# Allegro board 36i0_ctrl.brd
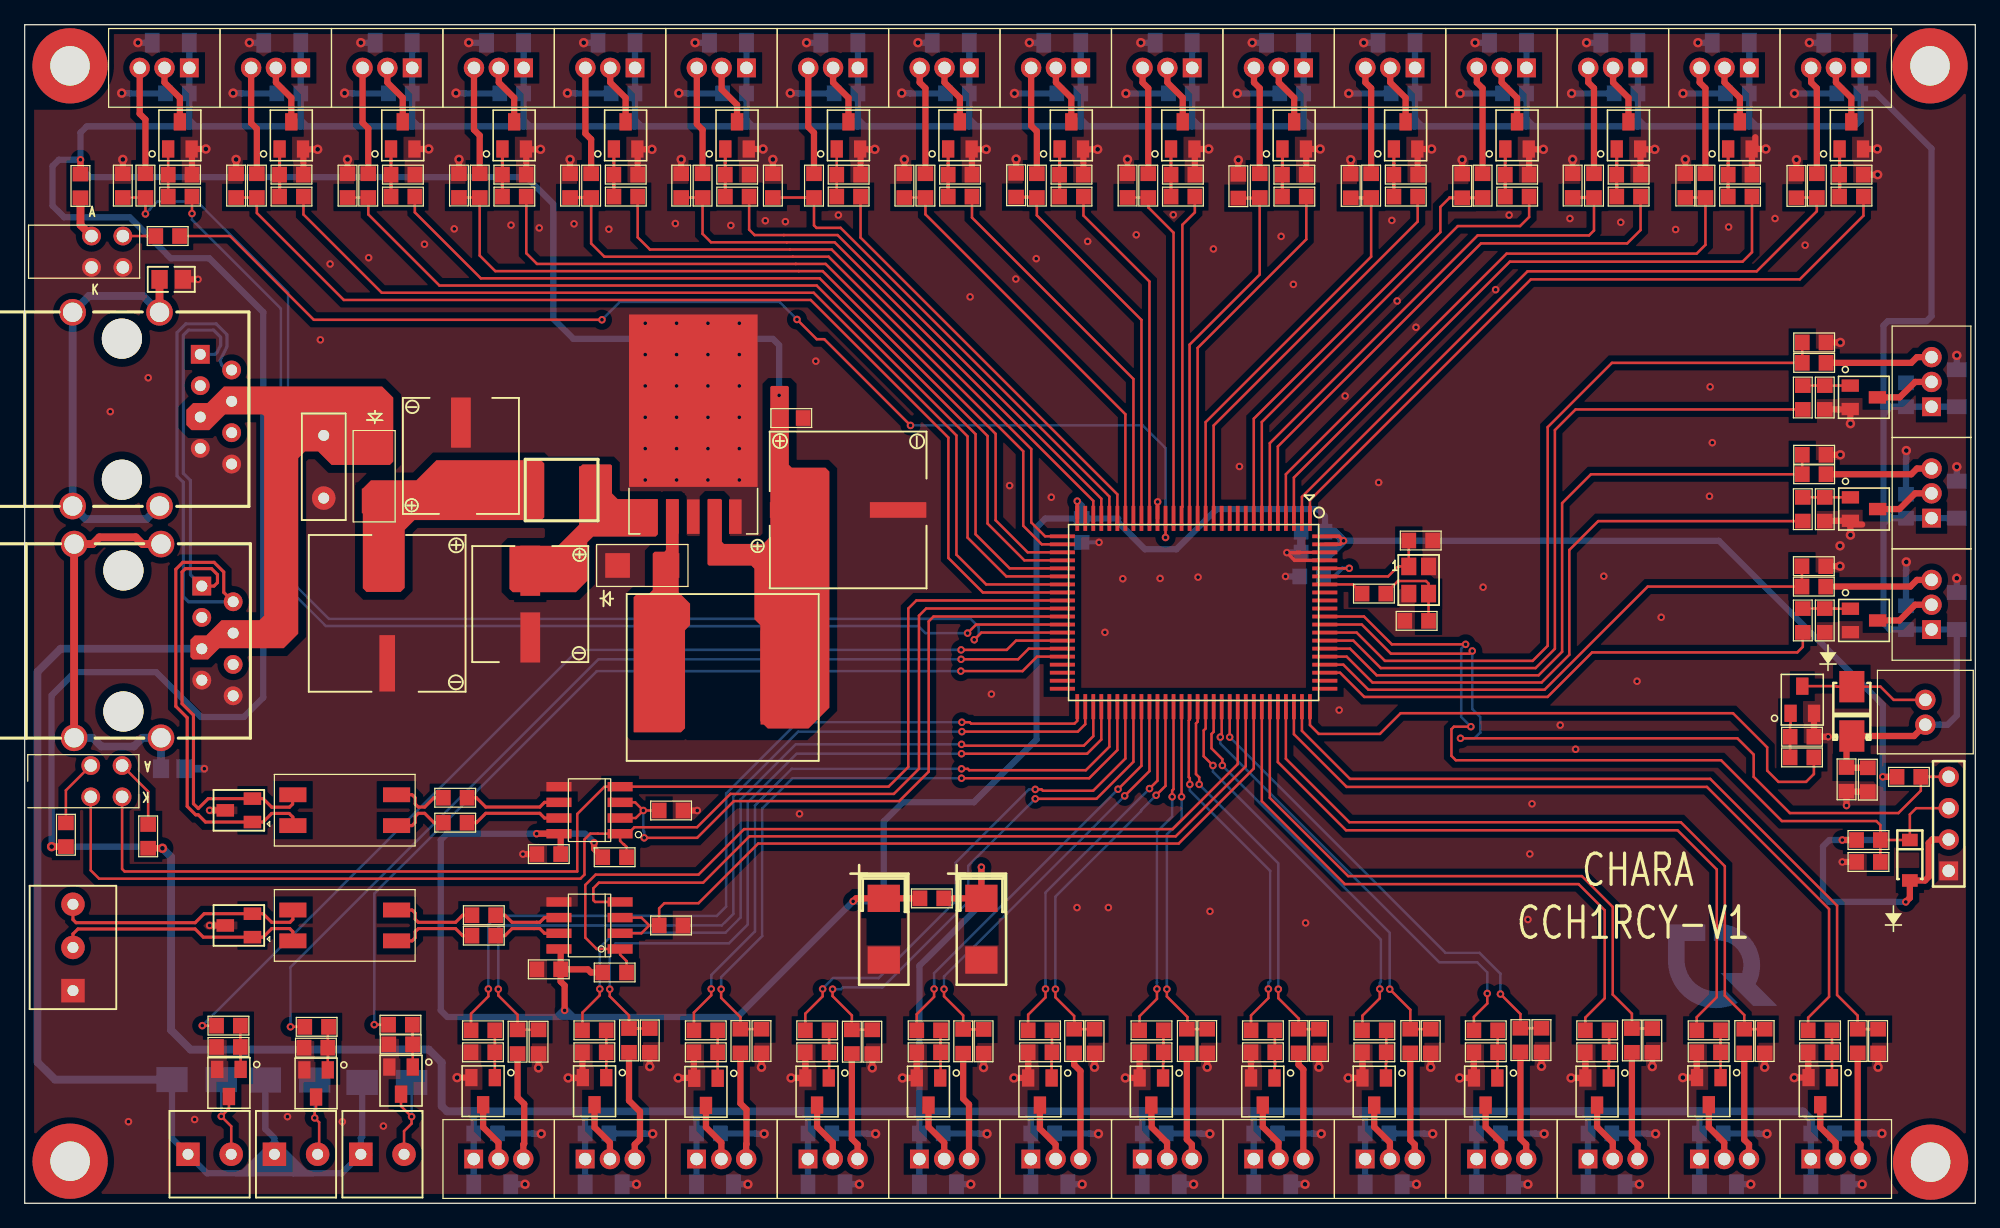
[diagram p0: board, top side]
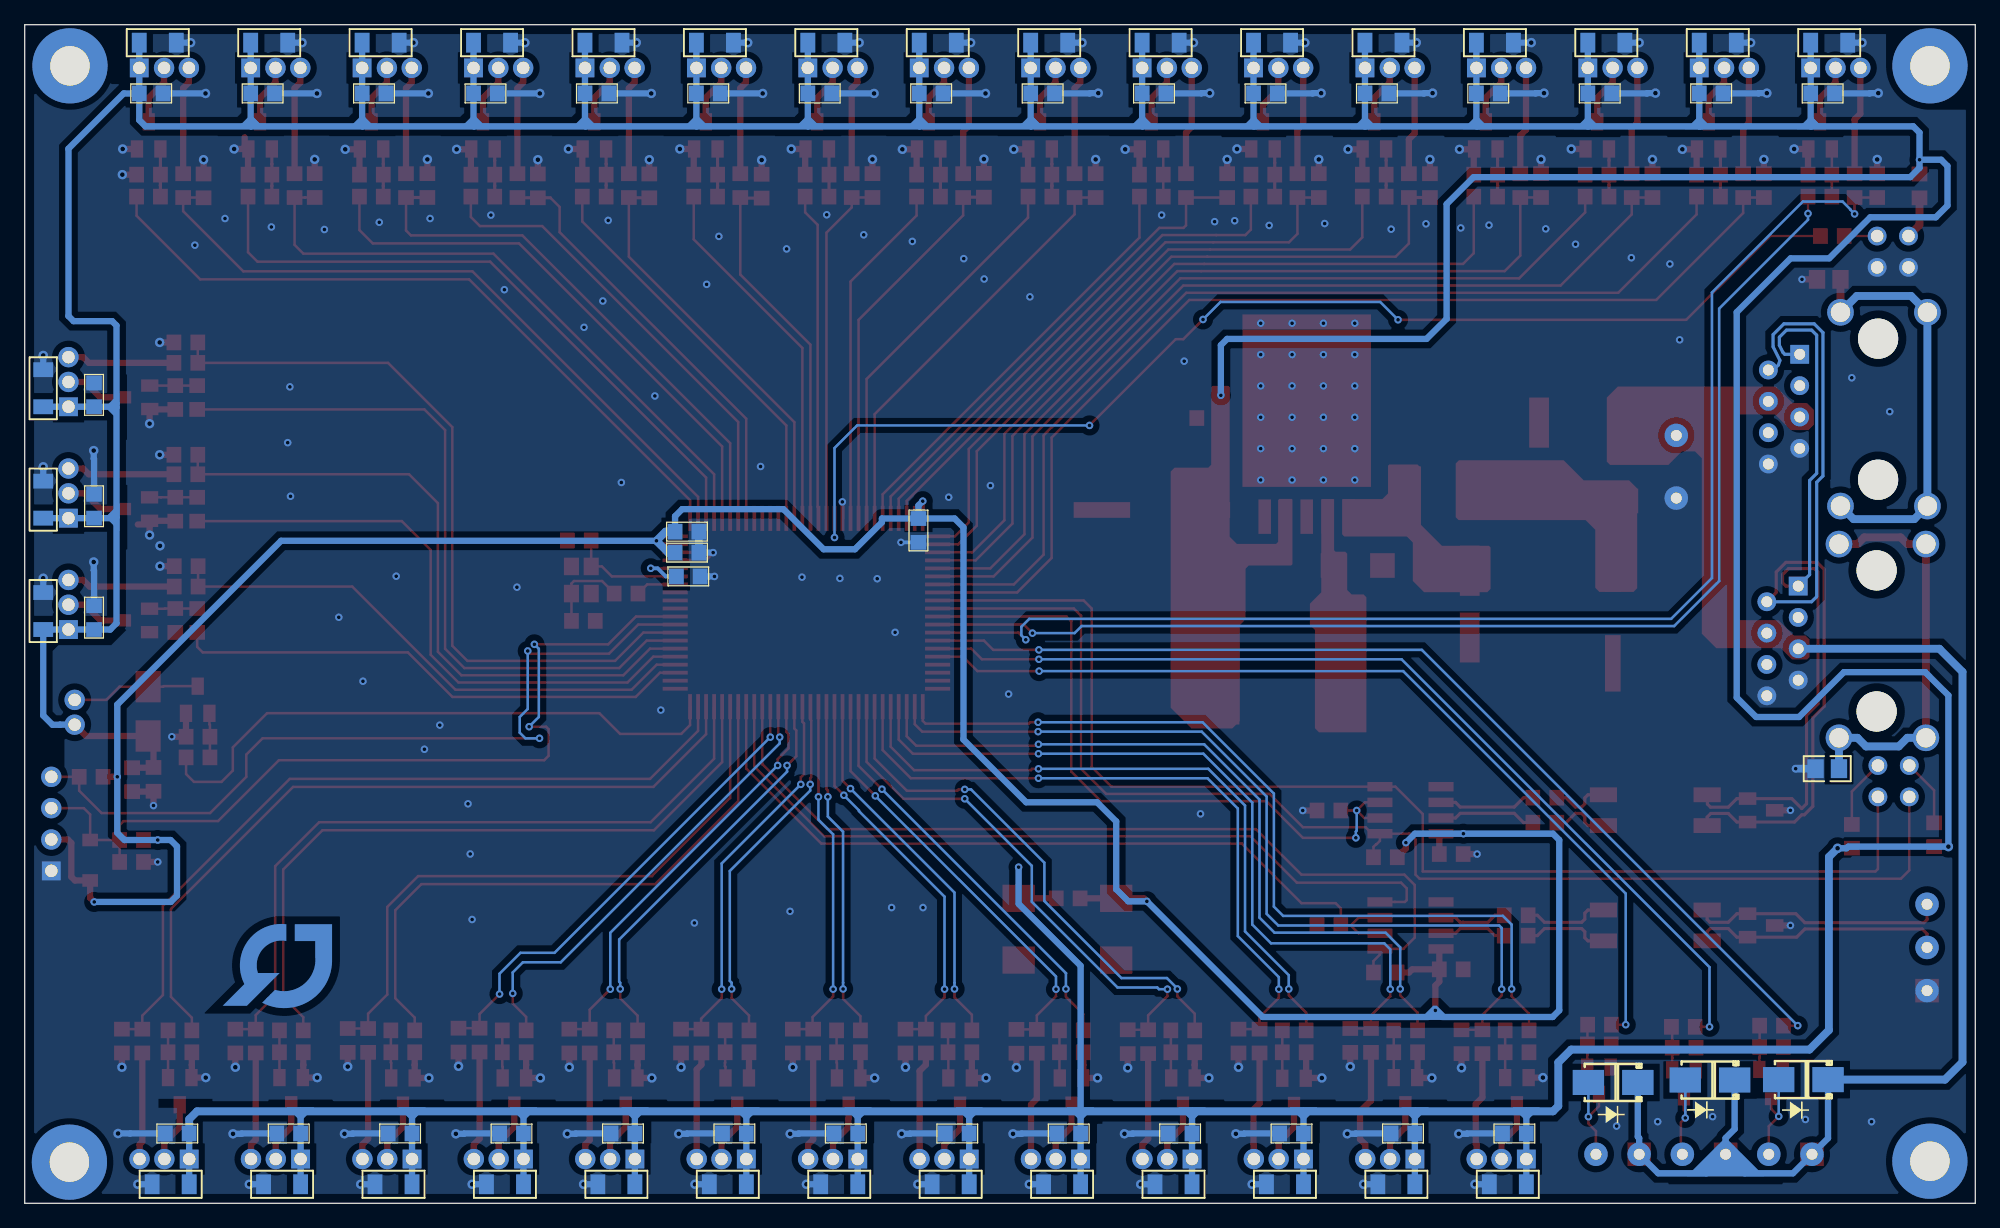
[diagram p1: board, bottom side, seen from below]

Outline 158 x 95.5 mm; copper layers: TOP, BOTTOM. Coordinates in mm from the lower left corner of the outline.
Outline path: 0,95.5 158,95.5 158,0 0,0 0,95.5

## Design rules (mm)
net group DIFFPAIR0: nets RS485_A RS485_B
net group DIFFPAIR1: nets N1101555 N1101559
net group DIFFPAIR2: nets N1101325 N1101379
net group DIFFPAIR3: nets RS485_A2 RS485_B2
net group DIFFPAIR4: nets N2237727 N2237775
net group DIFFPAIR5: nets N2237937 N2237941
net group PWR: nets 5V +24V VDD

## Placement (name value [footprint] x y rotation side)
C17  10uF/50V  [10UF_50V]  35.33 57.86 0 top
C18  100nF  [0805]  62.1 63.62 180 top
C20  470uF/25V  [220UF_50V]  66.7 56.18 270 top
C24  4.7uF/50V  [10UF_50V]  40.95 51.25 180 top
C42  20pF  [0805]  113.08 53.7 180 top
C43  20pF  [0805]  112.75 47.19 0 top
C51  100nF  [0805]  149.35 27.66 0 top
C92  100nF  [0805]  147.57 34.35 90 top
C93  100nF  [0805]  42.45 28.3 180 top
C94  1uF  [0805]  149.3 34.33 90 top
C107  10uF/16V  [1206]  65.99 94.04 180 bottom
C108  100nF  [0805]  66.53 89.93 0 bottom
C109  10uF/50V  [CASE_C_6032]  77.49 22.21 270 top
C111  10uF/16V  [1206]  64.95 1.54 0 bottom
C112  100nF  [0805]  64.41 5.66 180 bottom
C113  10uF/16V  [1206]  137.16 1.54 0 bottom
C114  100nF  [0805]  136.62 5.66 180 bottom
C115  10uF/16V  [1206]  138.2 94.04 180 bottom
C116  100nF  [0805]  138.73 89.93 0 bottom
C117  10uF/16V  [1206]  56.97 94.04 180 bottom
C118  100nF  [0805]  57.5 89.93 0 bottom
C121  100nF  [0805]  60.6 82.46 90 top
C123  100nF  [0805]  68.66 13.1 270 top
C124  100nF  [0805]  140.94 13.15 270 top
C125  100nF  [0805]  134.51 82.46 90 top
C126  100nF  [0805]  53.18 82.46 90 top
C128  100nF  [0805]  77.67 13.13 270 top
C129  100nF  [0805]  150.13 13.15 270 top
C130  100nF  [0805]  125.39 82.46 90 top
C131  100nF  [0805]  44.18 82.46 90 top
C132  100nF  [0805]  144.92 51.62 0 top
C133  100nF  [0805]  86.66 13.15 270 top
C135  100nF  [0805]  116.44 82.44 90 top
C136  100nF  [0805]  35.18 82.46 90 top
C137  100nF  [0805]  144.95 60.65 0 top
C138  100nF  [0805]  95.79 13.15 270 top
C140  100nF  [0805]  107.41 82.44 90 top
C141  100nF  [0805]  26.15 82.46 90 top
C142  100nF  [0805]  144.95 69.75 0 top
C143  100nF  [0805]  104.84 13.15 270 top
C145  100nF  [0805]  98.31 82.41 90 top
C146  100nF  [0805]  17.13 82.46 90 top
C147  100nF  [0805]  41.62 13.1 270 top
C148  100nF  [0805]  113.89 13.15 270 top
C150  100nF  [0805]  89.33 82.46 90 top
C151  100nF  [0805]  7.95 82.46 90 top
C152  100nF  [0805]  50.63 13.2 270 top
C153  100nF  [0805]  122.86 13.22 270 top
C155  100nF  [0805]  80.31 82.49 90 top
C157  100nF  [0805]  59.68 13.15 270 top
C158  100nF  [0805]  131.84 13.2 270 top
C159  100nF  [0805]  143.52 82.44 90 top
C160  100nF  [0805]  71.26 82.46 90 top
C161  10uF/16V  [1206]  73.97 1.54 0 bottom
C162  100nF  [0805]  73.44 5.66 180 bottom
C163  10uF/16V  [1206]  146.18 1.54 0 bottom
C164  100nF  [0805]  145.65 5.66 180 bottom
C165  10uF/16V  [1206]  129.17 94.04 180 bottom
C166  100nF  [0805]  129.71 89.93 0 bottom
C167  10uF/16V  [1206]  47.94 94.04 180 bottom
C168  100nF  [0805]  48.47 89.93 0 bottom
C169  10uF/16V  [1206]  156.5 47.99 90 bottom
C170  100nF  [0805]  152.39 47.45 270 bottom
C171  10uF/16V  [1206]  83 1.54 0 bottom
C172  100nF  [0805]  82.46 5.66 180 bottom
C175  10uF/16V  [1206]  120.15 94.04 180 bottom
C176  100nF  [0805]  120.68 89.93 0 bottom
C177  10uF/16V  [1206]  38.91 94.04 180 bottom
C178  100nF  [0805]  39.45 89.93 0 bottom
C179  10uF/16V  [1206]  156.5 57.01 90 bottom
C180  100nF  [0805]  152.39 56.48 270 bottom
C181  10uF/16V  [1206]  92.03 1.54 0 bottom
C182  100nF  [0805]  91.49 5.66 180 bottom
C183  10uF/16V  [1206]  111.12 94.04 180 bottom
C184  100nF  [0805]  111.66 89.93 0 bottom
C187  10uF/16V  [1206]  29.89 94.04 180 bottom
C188  100nF  [0805]  30.42 89.93 0 bottom
C189  10uF/16V  [1206]  156.5 66.04 90 bottom
C190  100nF  [0805]  152.39 65.51 270 bottom
C191  10uF/16V  [1206]  101.05 1.54 0 bottom
C192  100nF  [0805]  100.52 5.66 180 bottom
C195  10uF/16V  [1206]  102.1 94.04 180 bottom
C196  100nF  [0805]  102.63 89.93 0 bottom
C197  10uF/16V  [1206]  20.86 94.04 180 bottom
C198  100nF  [0805]  21.4 89.93 0 bottom
C199  10uF/16V  [1206]  37.87 1.54 0 bottom
C200  100nF  [0805]  37.33 5.66 180 bottom
C201  10uF/16V  [1206]  110.08 1.54 0 bottom
C202  100nF  [0805]  109.54 5.66 180 bottom
C205  10uF/16V  [1206]  93.07 94.04 180 bottom
C206  100nF  [0805]  93.6 89.93 0 bottom
C207  10uF/16V  [1206]  84.04 94.04 180 bottom
C208  100nF  [0805]  84.58 89.93 0 bottom
C211  10uF/16V  [1206]  46.9 1.54 0 bottom
C212  100nF  [0805]  46.36 5.66 180 bottom
C213  10uF/16V  [1206]  119.1 1.54 0 bottom
C214  100nF  [0805]  118.57 5.66 180 bottom
C215  10uF/16V  [1206]  11.84 94.04 180 bottom
C216  100nF  [0805]  12.37 89.93 0 bottom
C219  10uF/16V  [1206]  55.92 1.54 0 bottom
C220  100nF  [0805]  55.39 5.66 180 bottom
C221  10uF/16V  [1206]  128.13 1.54 0 bottom
C222  100nF  [0805]  127.59 5.66 180 bottom
C223  10uF/16V  [1206]  147.23 94.04 180 bottom
C224  100nF  [0805]  147.76 89.93 0 bottom
C225  10uF/16V  [1206]  75.02 94.04 180 bottom
C226  100nF  [0805]  75.55 89.93 0 bottom
C227  1uF  [0805]  104.25 50.79 180 bottom
C230  100nF  [0805]  85.61 54.52 90 bottom
C231  100nF  [0805]  104.36 54.42 180 bottom
C232  100nF  [0805]  104.36 52.72 180 bottom
C233  100nF  [0805]  42.45 18.96 180 top
C234  4,7uF/50V  [CASE_C_6032]  69.59 22.21 270 top
C235  220uF/50V  [220UF_50V]  29.36 47.8 180 top
D1  LED BI-COLOUR  [LED_DOUBLE_1]  5.35 35.47 0 top
D3  MRA4007  [CASE403D_SMA]  148 39.86 270 top
D5  SM712  [SOT23]  17.35 31.84 90 top
D7  SM712  [SOT23]  17.35 22.51 90 top
D14  SS34  [POWERDIODE]  28.31 60.91 270 top
D15  SS14  [POWERDIODE]  48.02 51.68 0 top
D48  LED BI-COLOUR  [LED_DOUBLE_1]  5.41 78.37 0 top
D49  1N4148  [SOD123]  152.7 27.8 90 top
D102  MRA4007  [CASE403D_SMA]  29.34 9.79 180 bottom
D104  MRA4007  [CASE403D_SMA]  21.49 9.99 180 bottom
D106  MRA4007  [CASE403D_SMA]  13.93 10.02 180 bottom
J1  CONN RECT 3  [CONN_RMC_1X3_80P]  67.49 92 180 top
J2  CONN_DEBUGGER  [BERG_1X4_2P54]  155.85 26.94 90 top
J3  CONN RECT 3  [CONN_RMC_1X3_80P]  63.45 3.59 0 top
J4  CONN RECT 3  [CONN_RMC_1X3_80P]  135.66 3.59 0 top
J5  CONN RECT 3  [CONN_RMC_1X3_80P]  139.7 92 180 top
J6  CONN RECT 3  [CONN_RMC_1X3_80P]  58.47 92 180 top
J8  CONN RECT 3  [CONN_RMC_1X3_80P]  72.47 3.59 0 top
J9  CONN RECT 3  [CONN_RMC_1X3_80P]  144.68 3.59 0 top
J10  CONN RECT 3  [CONN_RMC_1X3_80P]  130.67 92 180 top
J11  CONN RECT 3  [CONN_RMC_1X3_80P]  49.44 92 180 top
J12  CONN RECT 3  [CONN_RMC_1X3_80P]  154.46 46.49 90 top
J13  CONN RECT 3  [CONN_RMC_1X3_80P]  81.5 3.59 0 top
J15  CONN RECT 3  [CONN_RMC_1X3_80P]  121.65 92 180 top
J17  CONN RECT 3  [CONN_RMC_1X3_80P]  40.41 92 180 top
J18  CONN RECT 3  [CONN_RMC_1X3_80P]  154.46 55.51 90 top
J19  CONN RECT 3  [CONN_RMC_1X3_80P]  90.53 3.59 0 top
J21  CONN RECT 3  [CONN_RMC_1X3_80P]  112.62 92 180 top
J22  CONN RECT 3  [CONN_RMC_1X3_80P]  31.39 92 180 top
J23  CONN RECT 3  [CONN_RMC_1X3_80P]  154.46 64.54 90 top
J24  CONN RECT 3  [CONN_RMC_1X3_80P]  99.55 3.59 0 top
J25  RJ45-8Z4  [RJ45-J00-0014NL_2]  14.35 50.01 270 top
J26  CONN RECT 3  [CONN_RMC_1X3_80P]  103.6 92 180 top
J27  CONN RECT 3  [CONN_RMC_1X3_80P]  22.36 92 180 top
J28  CONN RECT 3  [CONN_RMC_1X3_80P]  36.37 3.59 0 top
J29  CONN RECT 3  [CONN_RMC_1X3_80P]  108.58 3.59 0 top
J31  CONN RECT 3  [CONN_RMC_1X3_80P]  94.57 92 180 top
J32  CONN RECT 3  [CONN_RMC_1X3_80P]  13.34 92 180 top
J33  CONN RECT 3  [CONN_RMC_1X3_80P]  45.4 3.59 0 top
J34  CONN RECT 3  [CONN_RMC_1X3_80P]  117.6 3.59 0 top
J36  CONN RECT 3  [CONN_RMC_1X3_80P]  85.54 92 180 top
J38  CONN RECT 3  [CONN_RMC_1X3_80P]  54.42 3.59 0 top
J39  CONN RECT 3  [CONN_RMC_1X3_80P]  126.63 3.59 0 top
J40  CONN RECT 3  [CONN_RMC_1X3_80P]  148.73 92 180 top
J41  CONN RECT 3  [CONN_RMC_1X3_80P]  76.52 92 180 top
J42  CONN RECT 2  [CONN_RMC_1X2_80P]  153.96 38.78 90 top
J43  RJ45-8Z4  [RJ45-J00-0014NL_2]  14.22 68.79 270 top
J44  CONN RECT 3  [CON_3_5MM_3PIN]  3.91 18.98 90 top
J69  TL_CONN_3.5MM  [CON_3_5MM_2PIN]  28.98 3.98 0 top
J72  TL_CONN_3.5MM  [CON_3_5MM_2PIN]  21.98 3.98 0 top
J73  TL_CONN_3.5MM  [CON_3_5MM_2PIN]  14.98 3.98 0 top
L3  CHOKE CM  [L3_CHOKE]  30.02 30.8 180 top
L5  CHOKE CM  [L3_CHOKE]  30.02 21.46 180 top
L7  FBMH4532HM132-T  [1812PS]  43.49 57.79 0 top
L8  DR127-101-R  [INDU_DR127-101-R]  56.54 42.61 0 top
L9  FERRITE BEAD 0805  [0805]  73.48 24.71 180 top
L10  FERRITE BEAD 0805  [L0805]  11.99 35.21 180 bottom
L11  FERRITE BEAD 0805  [L0805]  11.87 74.86 180 top
NOREF  -  []  158 0 90 top
NOREF#2  -  [unnamed#2]  154.34 92.16 0 top
NOREF#3  -  []  0 0 0 top
NOREF#4  -  [unnamed#2]  154.38 3.33 0 top
NOREF#5  -  [unnamed#2]  3.68 3.41 0 top
NOREF#6  -  [unnamed#2]  3.67 92.16 0 top
Q7  BC337  [SOT-23]  30.49 9.94 180 top
Q8  BC337  [SOT-23]  23.6 9.71 180 top
Q9  BC337  [SOT-23]  16.54 9.75 180 top
Q109  BSS138-SOT23  [SOT-23]  66.73 86.53 0 top
Q110  BSS138-SOT23  [SOT-23]  64.18 9.06 180 top
Q111  BSS138-SOT23  [SOT-23]  136.42 9.08 180 top
Q112  BSS138-SOT23  [SOT-23]  138.94 86.53 0 top
Q113  BSS138-SOT23  [SOT-23]  129.91 86.53 0 top
Q114  BSS138-SOT23  [SOT-23]  145.45 9.08 180 top
Q115  BSS138-SOT23  [SOT-23]  73.21 9.06 180 top
Q116  BSS138-SOT23  [SOT-23]  57.7 86.53 0 top
Q117  BSS138-SOT23  [SOT-23]  48.68 86.53 0 top
Q118  BSS138-SOT23  [SOT-23]  148.99 47.23 270 top
Q119  BSS138-SOT23  [SOT-23]  82.24 9.06 180 top
Q120  BSS138-SOT23  [SOT-23]  120.88 86.53 0 top
Q121  BSS138-SOT23  [SOT-23]  111.86 86.53 0 top
Q122  BSS138-SOT23  [SOT-23]  91.26 9.06 180 top
Q123  BSS138-SOT23  [SOT-23]  148.99 56.25 270 top
Q124  BSS138-SOT23  [SOT-23]  39.65 86.53 0 top
Q125  BSS138-SOT23  [SOT-23]  30.62 86.53 0 top
Q126  BSS138-SOT23  [SOT-23]  148.97 65.3 270 top
Q127  BSS138-SOT23  [SOT-23]  100.29 9.06 180 top
Q128  BSS138-SOT23  [SOT-23]  102.83 86.53 0 top
Q129  BSS138-SOT23  [SOT-23]  93.81 86.53 0 top
Q130  BSS138-SOT23  [SOT-23]  109.31 9.06 180 top
Q131  BSS138-SOT23  [SOT-23]  37.13 9.08 180 top
Q132  BSS138-SOT23  [SOT-23]  21.6 86.53 0 top
Q133  BSS138-SOT23  [SOT-23]  12.57 86.53 0 top
Q134  BSS138-SOT23  [SOT-23]  46.16 9.08 180 top
Q135  BSS138-SOT23  [SOT-23]  118.34 9.06 180 top
Q136  BSS138-SOT23  [SOT-23]  84.78 86.53 0 top
Q137  BSS138-SOT23  [SOT-23]  75.75 86.53 0 top
Q138  BSS138-SOT23  [SOT-23]  147.96 86.53 0 top
Q139  BSS138-SOT23  [SOT-23]  127.37 9.06 180 top
Q140  BSS138-SOT23  [SOT-23]  55.19 9.03 180 top
Q141  BSS138-SOT23  [SOT-23]  143.99 40.8 0 top
R11  1K  [0805]  66.74 81.57 180 top
R12  10K  [0805]  66.74 83.35 0 top
R14  1K  [0805]  4.52 82.43 270 top
R15  1K  [0805]  64.2 14.01 0 top
R16  10K  [0805]  64.2 12.24 180 top
R18  1K  [0805]  136.4 14.01 0 top
R19  10K  [0805]  136.4 12.24 180 top
R20  1K  [0805]  138.95 81.57 180 top
R21  10K  [0805]  138.95 83.35 0 top
R23  200E  [0805]  63.94 82.46 90 top
R27  200E  [0805]  67 13.1 270 top
R29  200E  [0805]  139.29 13.15 270 top
R31  200E  [0805]  136.14 82.46 90 top
R42  1K  [0805]  57.72 81.57 180 top
R43  10K  [0805]  57.71 83.35 0 top
R46  1K  [0805]  73.22 14.01 0 top
R47  10K  [0805]  73.22 12.24 180 top
R48  1K  [0805]  145.43 14.01 0 top
R49  10K  [0805]  145.43 12.24 180 top
R50  1K  [0805]  129.92 81.57 180 top
R51  10K  [0805]  129.92 83.35 0 top
R53  200E  [0805]  54.91 82.46 90 top
R57  200E  [0805]  76.02 13.13 270 top
R59  200E  [0805]  148.48 13.15 270 top
R61  200E  [0805]  127.12 82.46 90 top
R72  1K  [0805]  48.69 81.57 180 top
R73  10K  [0805]  48.69 83.35 0 top
R74  1K  [0805]  144.03 47.23 90 top
R75  10K  [0805]  145.81 47.23 270 top
R76  1K  [0805]  82.25 14.01 0 top
R77  10K  [0805]  82.25 12.24 180 top
R80  1K  [0805]  120.9 81.57 180 top
R81  10K  [0805]  120.9 83.35 0 top
R83  200E  [0805]  45.88 82.46 90 top
R85  200E  [0805]  144.92 49.97 0 top
R87  200E  [0805]  85.01 13.15 270 top
R91  200E  [0805]  118.09 82.46 90 top
R104  1K  [0805]  39.66 81.57 180 top
R105  10K  [0805]  39.66 83.35 0 top
R106  1K  [0805]  144.03 56.24 90 top
R107  10K  [0805]  145.81 56.24 270 top
R108  1K  [0805]  91.27 14.01 0 top
R109  10K  [0805]  91.27 12.24 180 top
R113  1K  [0805]  111.87 81.57 180 top
R114  10K  [0805]  111.87 83.35 0 top
R116  200E  [0805]  36.86 82.46 90 top
R118  200E  [0805]  144.95 59.07 0 top
R120  200E  [0805]  94.14 13.15 270 top
R122  330E  [0805]  30.44 14.47 0 top
R124  200E  [0805]  109.07 82.46 90 top
R125  200E  [0805]  109.29 49.4 180 top
R126  10K  [0805]  149.35 29.44 180 top
R128  330E  [0805]  16.51 14.4 0 top
R129  10K  [0805]  16.51 12.67 0 top
R137  1K  [0805]  30.64 81.57 180 top
R138  10K  [0805]  30.64 83.35 0 top
R139  1K  [0805]  144.03 65.29 90 top
R140  10K  [0805]  145.81 65.29 270 top
R141  1K  [0805]  100.3 14.01 0 top
R142  10K  [0805]  100.3 12.24 180 top
R145  1K  [0805]  102.85 81.57 180 top
R146  10K  [0805]  102.84 83.35 0 top
R148  200E  [0805]  27.83 82.46 90 top
R150  200E  [0805]  144.95 68.1 0 top
R152  200E  [0805]  103.19 13.15 270 top
R156  200E  [0805]  100.04 82.46 90 top
R167  1K  [0805]  21.61 81.57 180 top
R168  10K  [0805]  21.61 83.35 0 top
R169  1K  [0805]  37.12 14.01 0 top
R170  10K  [0805]  37.12 12.24 180 top
R171  1K  [0805]  109.33 14.01 0 top
R172  10K  [0805]  109.33 12.24 180 top
R175  1K  [0805]  93.82 81.57 180 top
R176  10K  [0805]  93.82 83.35 0 top
R178  200E  [0805]  18.81 82.46 90 top
R180  200E  [0805]  39.93 13.1 270 top
R182  200E  [0805]  112.24 13.15 270 top
R186  200E  [0805]  91.01 82.46 90 top
R197  1K  [0805]  12.59 81.57 180 top
R198  10K  [0805]  12.59 83.35 0 top
R199  1K  [0805]  46.14 14.01 0 top
R200  10K  [0805]  46.14 12.24 180 top
R201  1K  [0805]  118.35 14.01 0 top
R202  10K  [0805]  118.35 12.24 180 top
R205  1K  [0805]  84.79 81.57 180 top
R206  10K  [0805]  84.79 83.35 0 top
R208  200E  [0805]  9.78 82.46 90 top
R210  200E  [0805]  48.95 13.2 270 top
R212  200E  [0805]  121.16 13.22 270 top
R216  200E  [0805]  81.99 82.46 90 top
R229  1K  [0805]  55.17 14.01 0 top
R230  10K  [0805]  55.17 12.24 180 top
R231  1K  [0805]  127.38 14.01 0 top
R232  10K  [0805]  127.38 12.24 180 top
R233  1K  [0805]  147.98 81.57 180 top
R234  10K  [0805]  147.97 83.35 0 top
R235  1K  [0805]  75.77 81.57 180 top
R236  10K  [0805]  75.77 83.35 0 top
R240  200E  [0805]  57.98 13.15 270 top
R242  200E  [0805]  130.19 13.2 270 top
R244  200E  [0805]  145.17 82.46 90 top
R246  200E  [0805]  72.96 82.46 90 top
R247  1K  [0805]  3.34 29.87 90 top
R248  1K  [0805]  10 29.73 90 top
R251  10E  [0805]  34.87 32.86 180 top
R252  10E  [0805]  34.87 30.84 180 top
R253  330E  [0805]  143.97 36.13 180 top
R254  10K  [0805]  143.97 37.81 180 top
R255  10K  [0805]  52.36 31.83 0 top
R256  10K  [0805]  47.79 28.04 180 top
R260  10E  [0805]  37.19 23.34 180 top
R261  10E  [0805]  37.19 21.69 180 top
R262  10K  [0805]  52.36 22.51 0 top
R263  10K  [0805]  47.79 18.7 180 top
R265  4K7  [0805]  152.63 34.56 0 top
R267  10K  [0805]  30.45 12.88 0 top
R268  330E  [0805]  23.65 14.3 0 top
R269  10K  [0805]  23.59 12.61 0 top
R270  1K  [0805]  11.58 78.37 0 top
RV1  MOV  [RV1]  24.22 62.22 270 top
U4  SN65HVD3082ED  [SOIC8]  45.75 31.85 180 top
U6  SN65HVD3082ED  [SOIC8]  45.75 22.51 180 top
U15  LM2576 5V/TO-263-5  [TO-263-5]  54.16 55.64 0 top
U16  R5F100PFAFA  [TQFP20X14_100]  94.68 47.87 180 top
Y1  20MHz  [FA_238_250000MB_C3]  112.92 50.5 270 top

## Library data of the parts
C17 C24 C109 C234 = CAP
C18 C42 C43 C51 C92-C94 C108 C112 C114 C116 C118 C121 C123-C126 C128-C133 C135-C138 C140-C143 C145-C148 C150-C153 C155 C157-C160 C162 C164 C166 C168 C170 C172 C176 C178 C180 C182 C184 C188 C190 C192 C196 C198 C200 C202 C206 C208 C212 C214 C216 C220 C222 C224 C226 C227 C230-C233 = CAP NP
C20 C107 C111 C113 C115 C117 C161 C163 C165 C167 C169 C171 C175 C177 C179 C181 C183 C187 C189 C191 C195 C197 C199 C201 C205 C207 C211 C213 C215 C219 C221 C223 C225 C235 = CAP POL
D1 = LED BI-COLOUR_1
D3 D14 D49 D102 D104 D106 = DIODE
D5 D7 = SM712_2
D15 = DIODE SCHOTTKY
D48 = LED BI-COLOUR_2
J1 J3-J6 J8-J13 J15 J17-J19 J21-J24 J26-J29 J31-J34 J36 J38-J41 J44 = CONN RECT 3
J2 = CONN RECT 4_4
J25 J43 = RJ45-8Z4_1
J42 J69 J72 J73 = CONN RECT 2
L3 L5 = CHOKE CM
L7-L11 = INDUCTOR
Q7-Q9 = 2N3904_0
Q109-Q141 = BC547C_4
R11 R12 R14-R16 R18-R21 R23 R27 R29 R31 R42 R43 R46-R51 R53 R57 R59 R61 R72-R77 R80 R81 R83 R85 R87 R91 R104-R109 R113 R114 R116 R118 R120 R122 R124-R126 R128 R129 R137-R142 R145 R146 R148 R150 R152 R156 R167-R172 R175 R176 R178 R180 R182 R186 R197-R202 R205 R206 R208 R210 R212 R216 R229-R236 R240 R242 R244 R246-R248 R251-R256 R260-R263 R265 R267-R270 = R
RV1 = VARISTOR SYM
U4 U6 = MAX485_0: User Part Number: ***; Tolerance: ***
U15 = LM2575/TO220_3
U16 = R5F100PFAFA _3
Y1 = ZTA_3

## Footprints (pads in the part's own frame, mm; a bottom-side part is the same pattern mirrored in y, then rotated)
10UF_50V
  rect 1.6x4.064 smd: 1(0,0) 2(0,5.4)
220UF_50V
  rect 1.27x4.572 smd: 1(0,-4.05) 2(0,4.05)
0805
  rect 1.194x1.27 smd: 1(-0.965,0) 2(0.965,0)
1206
  rect 1.2x1.6 smd: 1(-1.5,0) 2(1.5,0)
1812PS
  rect 1.27x3.81 smd: 1(-2.083,0) 2(2.083,0)
BERG_1X4_2P54
  rect 1.524x1.524 hole 1.016: 1(0,0)
  round 1.651 hole 1.016: 2(2.54,0) 3(5.08,0) 4(7.62,0)
CASE403D_SMA
  rect 2.54x2.032 smd: 1(-2,0) 2(2,0)
CASE_C_6032
  rect 2.21x2.616 smd: 1(-2.499,0) 2(2.499,0)
CON_3_5MM_2PIN
  rect 1.905x1.905 hole 0.889: 1(-1.75,0)
  round 1.905 hole 0.889: 2(1.75,0)
CON_3_5MM_3PIN
  rect 1.905x1.905 hole 0.889: 1(-1.75,0)
  round 1.905 hole 0.889: 2(1.75,0) 3(5.25,0)
CONN_RMC_1X2_80P
  round 1.651 hole 1.016: 1(0,0) 2(2.01,0)
CONN_RMC_1X3_80P
  rect 1.524x1.524 hole 1.016: 1(0,0)
  round 1.651 hole 1.016: 2(2.01,0) 3(4.02,0)
FA_238_250000MB_C3
  rect 1.422x1.219 smd: 1(-1.1,-0.8) 2(1.1,-0.8) 3(1.1,0.8) 4(-1.1,0.8)
INDU_DR127-101-R
  rect 3.81x7.62 smd: 1(-4.975,0) 2(4.975,0)
L3_CHOKE
  rect 2.2x1.2 smd: 1(-0.1,-2.3) 2(-0.1,0.2) 3(8.3,-2.3) 4(8.3,0.2)
L0805
  rect 1.321x1.524 smd: 1(-0.95,0) 2(0.95,0)
LED_DOUBLE_1
  round 1.524 hole 1.016: 1(0,0) 2(2.54,0) 3(2.54,-2.54) 4(0,-2.54)
POWERDIODE
  rect 2x2 smd: 1(0,0) 2(4,0)
RJ45-J00-0014NL_2
  round 3.251 hole 3.251 unplated: (-1.27,-6.35) (10.16,-6.35)
  rect 1.524x1.524 hole 0.889: 1(0,0)
  round 1.524 hole 0.889: 2(1.27,2.54) 3(2.54,0) 4(3.81,2.54) 5(5.08,0) 6(6.35,2.54) 7(7.62,0) 8(8.89,2.54)
  round 2.159 hole 1.575: SH1(-3.404,-3.302) SH2(12.294,-3.302) SH3(-3.404,-10.342) SH4(12.294,-10.342)
RV1
  round 1.905 hole 0.889: 1(0,0) 2(5.08,0)
SOD123
  rect 1.016x1.27 smd: 1(-1.638,0) 2(1.638,0)
SOIC8
  rect 2.032x0.762 smd: 1(-2.477,1.905) 2(-2.477,0.635) 3(-2.477,-0.635) 4(-2.477,-1.905) 5(2.477,-1.905) 6(2.477,-0.635) 7(2.477,0.635) 8(2.477,1.905)
SOT23
  rect 1.016x1.422 smd: 1(-0.95,-1.1) 2(0.95,-1.1) 3(0,1.1)
SOT-23
  rect 1x1.4 smd: 1(-0.95,-1.1) 2(0.95,-1.1) 3(0,1.1)
TO-263-5
  rect 1.016x2.794 smd: 1(-3.404,0) 2(-1.702,0) 3(0,0) 4(1.702,0) 5(3.404,0)
  rect 10.414x13.97 smd: 6(0,9.398)
TQFP20X14_100
  rect 0.305x2.032 smd: 1(-9.425,-7.627) 2(-8.775,-7.627) 3(-8.125,-7.627) 4(-7.475,-7.627) 5(-6.825,-7.627) 6(-6.175,-7.627) 7(-5.525,-7.627) 8(-4.875,-7.627) 9(-4.225,-7.627) 10(-3.575,-7.627) 11(-2.925,-7.627) 12(-2.275,-7.627) 13(-1.625,-7.627) 14(-0.975,-7.627) 15(-0.325,-7.627) 16(0.325,-7.627) 17(0.975,-7.627) 18(1.625,-7.627) 19(2.275,-7.627) 20(2.925,-7.627) 21(3.575,-7.627) 22(4.225,-7.627) 23(4.875,-7.627) 24(5.525,-7.627) 25(6.175,-7.627) 26(6.825,-7.627) 27(7.475,-7.627) 28(8.125,-7.627) 29(8.775,-7.627) 30(9.425,-7.627) 51(9.425,7.627) 52(8.775,7.627) 53(8.125,7.627) 54(7.475,7.627) 55(6.825,7.627) 56(6.175,7.627) 57(5.525,7.627) 58(4.875,7.627) 59(4.225,7.627) 60(3.575,7.627) 61(2.925,7.627) 62(2.275,7.627) 63(1.625,7.627) 64(0.975,7.627) 65(0.325,7.627) 66(-0.325,7.627) 67(-0.975,7.627) 68(-1.625,7.627) 69(-2.275,7.627) 70(-2.925,7.627) 71(-3.575,7.627) 72(-4.225,7.627) 73(-4.875,7.627) 74(-5.525,7.627) 75(-6.175,7.627) 76(-6.825,7.627) 77(-7.475,7.627) 78(-8.125,7.627) 79(-8.775,7.627) 80(-9.425,7.627)
  rect 2.032x0.305 smd: 31(10.627,-6.175) 32(10.627,-5.525) 33(10.627,-4.875) 34(10.627,-4.225) 35(10.627,-3.575) 36(10.627,-2.925) 37(10.627,-2.275) 38(10.627,-1.625) 39(10.627,-0.975) 40(10.627,-0.325) 41(10.627,0.325) 42(10.627,0.975) 43(10.627,1.625) 44(10.627,2.275) 45(10.627,2.925) 46(10.627,3.575) 47(10.627,4.225) 48(10.627,4.875) 49(10.627,5.525) 50(10.627,6.175) 81(-10.627,6.175) 82(-10.627,5.525) 83(-10.627,4.875) 84(-10.627,4.225) 85(-10.627,3.575) 86(-10.627,2.925) 87(-10.627,2.275) 88(-10.627,1.625) 89(-10.627,0.975) 90(-10.627,0.325) 91(-10.627,-0.325) 92(-10.627,-0.975) 93(-10.627,-1.625) 94(-10.627,-2.275) 95(-10.627,-2.925) 96(-10.627,-3.575) 97(-10.627,-4.225) 98(-10.627,-4.875) 99(-10.627,-5.525) 100(-10.627,-6.175)
unnamed#2
  round 6.096 hole 3.2: (0,0)

## Nets
5V: C18.2 C20.1 C92.2 C94.2 C107.1 C108.2 C109.1 C111.1 C112.2 C113.1 C114.2 C115.1 C116.2 C117.1 C118.2 C161.1 C162.2 C163.1 C164.2 C165.1 C166.2 C167.1 C168.2 C169.1 C170.2 C171.1 C172.2 C175.1 C176.2 C177.1 C178.2 C179.1 C180.2 C181.1 C182.2 C183.1 C184.2 C187.1 C188.2 C189.1 C190.2 C191.1 C192.2 C195.1 C196.2 C197.1 C198.2 C199.1 C200.2 C201.1 C202.2 C205.1 C206.2 C207.1 C208.2 C211.1 C212.2 C213.1 C214.2 C215.1 C216.2 C219.1 C220.2 C221.1 C222.2 C223.1 C224.2 C225.1 C226.2 D3.2(K) J1.1 J3.1 J4.1 J5.1 J6.1 J8.1 J9.1 J10.1 J11.1 J12.1 J13.1 J15.1 J17.1 J18.1 J19.1 J21.1 J22.1 J23.1 J24.1 J26.1 J27.1 J28.1 J29.1 J31.1 J32.1 J33.1 J34.1 J36.1 J38.1 J39.1 J40.1 J41.1 J42.1 L8.2 L9.1 R14.1 R247.1 R248.1 U15.4(FB)
+24V: D14.1(A) D102.2(K) D104.2(K) D106.2(K) J25.4 J25.5 J43.4 J43.5 J69.1 J72.1 J73.1 RV1.1
VDD: C93.1 C230.2 C231.1 C232.1 C233.1 C234.1 D49.1(K) J2.2 L9.2 R126.2 R256.2 R263.2 R265.1 U4.8(VCC) U6.8(VCC) U16.30(EVDD1) U16.99(VDD) U16.100(EVDDO)
0: C17.2 C18.1 C20.2 C24.2 C42.1 C43.1 C51.1 C92.1 C93.2 C94.1 C107.2 C108.1 C109.2 C111.2 C112.1 C113.2 C114.1 C115.2 C116.1 C117.2 C118.1 C121.2 C123.2 C124.2 C125.2 C126.2 C128.2 C129.2 C130.2 C131.2 C132.2 C133.2 C135.2 C136.2 C137.2 C138.2 C140.2 C141.2 C142.2 C143.2 C145.2 C146.2 C147.2 C148.2 C150.2 C151.2 C152.2 C153.2 C155.2 C157.2 C158.2 C159.2 C160.2 C161.2 C162.1 C163.2 C164.1 C165.2 C166.1 C167.2 C168.1 C169.2 C170.1 C171.2 C172.1 C175.2 C176.1 C177.2 C178.1 C179.2 C180.1 C181.2 C182.1 C183.2 C184.1 C187.2 C188.1 C189.2 C190.1 C191.2 C192.1 C195.2 C196.1 C197.2 C198.1 C199.2 C200.1 C201.2 C202.1 C205.2 C206.1 C207.2 C208.1 C211.2 C212.1 C213.2 C214.1 C215.2 C216.1 C219.2 C220.1 C221.2 C222.1 C223.2 C224.1 C225.2 C226.1 C227.2 C230.1 C231.2 C232.2 C233.2 C234.2 C235.2 D5.3 D7.3 D15.1(ANODE) D48.3 D48.4 J2.1 J25.7 J25.8 J43.7 J43.8 J44.1 L10.1 L11.1 Q7.2(EMITTER) Q8.2(EMITTER) Q9.2(EMITTER) Q109.2(EMITTER) Q110.2(EMITTER) Q111.2(EMITTER) Q112.2(EMITTER) Q113.2(EMITTER) Q114.2(EMITTER) Q115.2(EMITTER) Q116.2(EMITTER) Q117.2(EMITTER) Q118.2(EMITTER) Q119.2(EMITTER) Q120.2(EMITTER) Q121.2(EMITTER) Q122.2(EMITTER) Q123.2(EMITTER) Q124.2(EMITTER) Q125.2(EMITTER) Q126.2(EMITTER) Q127.2(EMITTER) Q128.2(EMITTER) Q129.2(EMITTER) Q130.2(EMITTER) Q131.2(EMITTER) Q132.2(EMITTER) Q133.2(EMITTER) Q134.2(EMITTER) Q135.2(EMITTER) Q136.2(EMITTER) Q137.2(EMITTER) Q138.2(EMITTER) Q139.2(EMITTER) Q140.2(EMITTER) Q141.2(EMITTER) R12.2 R16.2 R19.2 R21.2 R43.2 R47.2 R49.2 R51.2 R73.2 R75.2 R77.2 R81.2 R105.2 R107.2 R109.2 R114.2 R129.1 R138.2 R140.2 R142.2 R146.2 R168.2 R170.2 R172.2 R176.2 R198.2 R200.2 R202.2 R206.2 R230.2 R232.2 R234.2 R236.2 R254.1 R255.2 R262.2 R267.1 R269.1 RV1.2 U4.5(GND) U6.5(GND) U15.3(GND) U15.5(O\N\/OFF) U15.6(G) U16.20(EVSS1) U16.97(VSS) U16.98(EVSS0) Y1.2 Y1.4
BUZZER_DRV: R253.1 U16.80(P140)
LT1_DRV3: R128.1 U16.44(P12)
NRST: C51.2 D49.2(A) J2.3 R126.1 U16.90(R\E\S\E\T\)
PROCESSOR_LED: R270.2 U16.19(P05)
RS485_A: D5.2 J25.1 J43.1 L3.3
RS485_A2: D7.2 J44.3 L5.3
RS485_B: D5.1 J25.2 J43.2 L3.4
RS485_B2: D7.1 J44.2 L5.4
RS485_DIR: R255.1 U4.2(R\E\) U4.3(DE) U16.41(P15)
RS485_DIR2: R262.1 U6.2(R\E\) U6.3(DE) U16.73(P01)
RX: D1.4 R256.1 U4.1(RO) U16.40(P16/RXD0)
RX2: R263.1 U6.1(RO) U16.71(P03/RXD1)
SEN_DRV1: R11.1 U16.25(P84/(INTP6))
SEN_DRV2: R42.1 U16.27(P86/(INTP8))
SEN_DRV3: R72.1 U16.31(P50)
SEN_DRV4: R104.1 U16.33(P52)
SEN_DRV5: R137.1 U16.35(P54)
SEN_DRV6: R167.1 U16.37(P56)
SEN_DRV7: R197.1 U16.42(P14)
SEN_DRV11: R74.1 U16.83(P46)
SEN_DRV12: R106.1 U16.85(P44)
SEN_DRV13: R139.1 U16.87(P42)
SEN_DRV14: R169.1 U16.51(P147)
SEN_DRV15: R199.1 U16.53(P156)
SEN_DRV16: R229.1 U16.55(P154)
SEN_DRV17: R15.1 U16.57(P152)
SEN_DRV18: R46.1 U16.59(P150)
SEN_DRV19: R76.1 U16.61(P26)
SEN_DRV20: R108.1 U16.63(P24)
SEN_DRV21: R141.1 U16.65(P22)
SEN_DRV22: R171.1 U16.67(P20)
SEN_DRV23: R201.1 U16.69(P102)
SEN_DRV24: R231.1 U16.74(P00)
SEN_DRV25: R18.1 U16.76(P144)
SEN_DRV26: R48.1 U16.78(P142)
SEN_DRV32: R233.1 U16.1(P60/SCLA0)
SEN_DRV33: R20.1 U16.3(P62/SCLA1)
SEN_DRV34: R50.1 U16.5(P31/TI03/TO03/INTP4/(PCLBUZ0))
SEN_DRV35: R80.1 U16.7(P65/TI11/TO11)
SEN_DRV36: R113.1 U16.13(P74/KR4/INTP8)
SEN_DRV37: R145.1 U16.15(P72/KR2/SO21)
SEN_DRV38: R175.1 U16.17(P70/KR0/SCK21/SCL21)
SEN_DRV39: R205.1 U16.21(P80/(SCK10)/(SCL10))
SEN_DRV40: R235.1 U16.23(P82/(SO10)/(TXD1))
SEN_IN1: C121.1 R23.1 U16.26(P85/(INTP7))
SEN_IN2: C126.1 R53.1 U16.28(P87/(INTP9))
SEN_IN3: C131.1 R83.1 U16.32(P51)
SEN_IN4: C136.1 R116.1 U16.34(P53)
SEN_IN5: C141.1 R148.1 U16.36(P55)
SEN_IN6: C146.1 R178.1 U16.38(P57)
SEN_IN7: C151.1 R208.1 U16.43(P13)
SEN_IN11: C132.1 R85.1 U16.84(P45)
SEN_IN12: C137.1 R118.1 U16.86(P43)
SEN_IN13: C142.1 R150.1 U16.88(P41)
SEN_IN14: C147.1 R180.1 U16.52(P100)
SEN_IN15: C152.1 R210.1 U16.54(P155)
SEN_IN16: C157.1 R240.1 U16.56(P153)
SEN_IN17: C123.1 R27.1 U16.58(P151)
SEN_IN18: C128.1 R57.1 U16.60(P27)
SEN_IN19: C133.1 R87.1 U16.62(P25)
SEN_IN20: C138.1 R120.1 U16.64(P23)
SEN_IN21: C143.1 R152.1 U16.66(P21)
SEN_IN22: C148.1 R182.1 U16.68(P130)
SEN_IN23: C153.1 R212.1 U16.70(P04)
SEN_IN24: C158.1 R242.1 U16.75(P145)
SEN_IN25: C124.1 R29.1 U16.77(P143)
SEN_IN26: C129.1 R59.1 U16.79(P141)
SEN_IN32: C159.1 R244.1 U16.2(P61/SDAA0)
SEN_IN33: C125.1 R31.1 U16.4(P63/SDAA1)
SEN_IN34: C130.1 R61.1 U16.6(P64/TI10/TO10)
SEN_IN35: C135.1 R91.1 U16.8(P66/TI12/TO12)
SEN_IN36: C140.1 R124.1 U16.14(P73/KR3)
SEN_IN37: C145.1 R156.1 U16.16(P71/KR1/SI21/SDA21)
SEN_IN38: C150.1 R186.1 U16.18(P06)
SEN_IN39: C155.1 R216.1 U16.22(P81/(SI10)/(RXD1)/(SDA10))
SEN_IN40: C160.1 R246.1 U16.24(P83)
TL1_DRV1: R122.1 U16.46(P10)
TL1_DRV2: R268.1 U16.45(P11)
TL1_OUT1: D102.1(A) J69.2 Q7.3(COLLECTOR)
TL1_OUT2: D104.1(A) J72.2 Q8.3(COLLECTOR)
TL1_OUT3: D106.1(A) J73.2 Q9.3(COLLECTOR)
TOOL0: J2.4 R265.2 U16.89(P40/TOOL0)
TX: D1.3 U4.4(DI) U16.39(P17/TXD0)
TX2: U6.4(DI) U16.72(P02/TXD1)
X1: C42.2 U16.95(P121/X1) Y1.1
X2: R125.2 U16.94(P122/X2/EXCLK)
N1101325: L3.1 R251.2
N1101379: L3.2 R252.2
N1101555: R251.1 U4.6(A)
N1101559: R252.1 U4.7(B\)
N1106017: J1.3 R23.2
N1106095: J1.2 Q109.3(COLLECTOR)
N1106175: Q109.1(BASE) R11.2 R12.1
N1107720: J3.3 R27.2
N1107862: Q110.1(BASE) R15.2 R16.1
N1107928: J3.2 Q110.3(COLLECTOR)
N1108501: J4.3 R29.2
N1108643: Q111.1(BASE) R18.2 R19.1
N1108709: J4.2 Q111.3(COLLECTOR)
N1109306: J5.3 R31.2
N1109366: J5.2 Q112.3(COLLECTOR)
N1109448: Q112.1(BASE) R20.2 R21.1
N1111271: J6.3 R53.2
N1111413: Q116.1(BASE) R42.2 R43.1
N1111479: J6.2 Q116.3(COLLECTOR)
N1111867: J8.3 R57.2
N1112009: Q115.1(BASE) R46.2 R47.1
N1112067: J8.2 Q115.3(COLLECTOR)
N1112165: J9.3 R59.2
N1112307: Q114.1(BASE) R48.2 R49.1
N1112373: J9.2 Q114.3(COLLECTOR)
N1112463: J10.3 R61.2
N1112589: Q113.1(BASE) R50.2 R51.1
N1112663: J10.2 Q113.3(COLLECTOR)
N1114592: J11.3 R83.2
N1114734: Q117.1(BASE) R72.2 R73.1
N1114800: J11.2 Q117.3(COLLECTOR)
N1114890: J12.3 R85.2
N1115016: Q118.1(BASE) R74.2 R75.1
N1115090: J12.2 Q118.3(COLLECTOR)
N1115188: J13.3 R87.2
N1115330: Q119.1(BASE) R76.2 R77.1
N1115388: J13.2 Q119.3(COLLECTOR)
N1115784: J15.3 R91.2
N1115910: Q120.1(BASE) R80.2 R81.1
N1115984: J15.2 Q120.3(COLLECTOR)
N1118039: J17.3 R116.2
N1118181: Q124.1(BASE) R104.2 R105.1
N1118247: J17.2 Q124.3(COLLECTOR)
N1118337: J18.3 R118.2
N1118463: Q123.1(BASE) R106.2 R107.1
N1118537: J18.2 Q123.3(COLLECTOR)
N1118635: J19.3 R120.2
N1118777: Q122.1(BASE) R108.2 R109.1
N1118835: J19.2 Q122.3(COLLECTOR)
N1119231: J21.3 R124.2
N1119357: Q121.1(BASE) R113.2 R114.1
N1119431: J21.2 Q121.3(COLLECTOR)
N1121614: J22.3 R148.2
N1121756: Q125.1(BASE) R137.2 R138.1
N1121822: J22.2 Q125.3(COLLECTOR)
N1121912: J23.3 R150.2
N1122038: Q126.1(BASE) R139.2 R140.1
N1122112: J23.2 Q126.3(COLLECTOR)
N1122210: J24.3 R152.2
N1122352: Q127.1(BASE) R141.2 R142.1
N1122410: J24.2 Q127.3(COLLECTOR)
N1122806: J26.3 R156.2
N1122932: Q128.1(BASE) R145.2 R146.1
N1123006: J26.2 Q128.3(COLLECTOR)
N1125305: J27.3 R178.2
N1125447: Q132.1(BASE) R167.2 R168.1
N1125513: J27.2 Q132.3(COLLECTOR)
N1125603: J28.3 R180.2
N1125729: Q131.1(BASE) R169.2 R170.1
N1125803: J28.2 Q131.3(COLLECTOR)
N1125901: J29.3 R182.2
N1126043: Q130.1(BASE) R171.2 R172.1
N1126101: J29.2 Q130.3(COLLECTOR)
N1126497: J31.3 R186.2
N1126623: Q129.1(BASE) R175.2 R176.1
N1126697: J31.2 Q129.3(COLLECTOR)
N1129118: J32.3 R208.2
N1129260: Q133.1(BASE) R197.2 R198.1
N1129326: J32.2 Q133.3(COLLECTOR)
N1129416: J33.3 R210.2
N1129542: Q134.1(BASE) R199.2 R200.1
N1129616: J33.2 Q134.3(COLLECTOR)
N1129714: J34.3 R212.2
N1129856: Q135.1(BASE) R201.2 R202.1
N1129914: J34.2 Q135.3(COLLECTOR)
N1130310: J36.3 R216.2
N1130436: Q136.1(BASE) R205.2 R206.1
N1130510: J36.2 Q136.3(COLLECTOR)
N1133367: J38.3 R240.2
N1133493: Q140.1(BASE) R229.2 R230.1
N1133567: J38.2 Q140.3(COLLECTOR)
N1133665: J39.3 R242.2
N1133807: Q139.1(BASE) R231.2 R232.1
N1133865: J39.2 Q139.3(COLLECTOR)
N1133963: J40.3 R244.2
N1134105: Q138.1(BASE) R233.2 R234.1
N1134171: J40.2 Q138.3(COLLECTOR)
N1134261: J41.3 R246.2
N1134387: Q137.1(BASE) R235.2 R236.1
N1134461: J41.2 Q137.3(COLLECTOR)
N2237727: L5.1 R260.2
N2237775: L5.2 R261.2
N2237937: R260.1 U6.6(A)
N2237941: R261.1 U6.7(B\)
N2299780: J25.SH1(S1) J25.SH2(S2) J25.SH3(S3) J25.SH4(S4) L10.2
N2299910: J43.SH1(S1) J43.SH2(S2) J43.SH3(S3) J43.SH4(S4) L11.2
N2302427: C43.2 R125.1 Y1.3
N2306083: C227.1 U16.96(REGC)
N2336579: Q7.1(BASE) R122.2 R267.2
N2336719: Q8.1(BASE) R268.2 R269.2
N2336835: Q9.1(BASE) R128.2 R129.2
N2344390: D3.1(A) J42.2 Q141.3(COLLECTOR)
N2344422: Q141.1(BASE) R253.2 R254.2
N2357985: C24.1 L7.2 U15.1(VIN)
N2358077: C17.1 C235.1 D14.2(K) L7.1
N2358169: D15.2(CATHODE) L8.1 U15.2(OUT)
N2358303: D48.1 R14.2
N2358319: D48.2 R270.1
N2552664: D1.1 R247.2
N2552666: D1.2 R248.2

Pads without a net: J25 3 6; J43 3 6; U16 9 10 11 12 29 47 48 49 50 81 82 91 92 93

## Via types
v1: diameter 0.61, hole 0.305, TOP to BOTTOM, 183 vias
v2: diameter 0.762, hole 0.381, TOP to BOTTOM, 129 vias

## Routing (per net, layer and track width the routed paths; a pad name or vN(x,y) marks a point on that pad's centre or on a via; arc(x,y) is an arc through that point)
5V: length 774.9
  TOP w0.508: J42.1 153.04,37.86 D3.2 147.57,37.43 C92.2 147.6,35.29 C94.2 ; v1(77.49,27.24) C109.1 L9.1 ; R14.1 v1(4.52,84.55) ; R248.1 v2(11.16,28.77) ; R247.1 v2(2.18,28.9)
  BOTTOM w0.508: 139.67,87.26 139.7,87.29 C116.2 J5.1 C115.1 ; 139.67,87.26 148.22,87.26 148.73,87.77 C224.2 ; 139.67,87.26 130.65,87.26 ; 36.36,7.45 36.37,7.44 C200.2 J28.1 C199.1 ; C221.1 J39.1 C222.2 126.63,7.44 126.62,7.45 ; 112.59,87.26 103.57,87.26 ; 112.59,87.26 121.62,87.26 ; 112.59,87.26 112.62,87.29 C184.2 J21.1 C183.1 ; 103.57,87.26 94.54,87.26 ; 103.57,87.26 103.6,87.29 C196.2 J26.1 C195.1 ; 67.46,87.26 67.49,87.29 C108.2 J1.1 C107.1 ; 67.46,87.26 76.49,87.26 ; 67.46,87.26 58.44,87.26 ; 108.57,7.45 108.58,7.44 C202.2 J29.1 C201.1 ; 90.51,7.45 90.53,7.44 C182.2 J19.1 C181.1 ; 13.31,87.26 13.34,87.29 C216.2 J32.1 C215.1 ; 13.31,87.26 22.33,87.26 ; 13.31,87.26 5.03,87.26 4.52,86.75 v1(4.52,84.55) ; C205.1 J31.1 C206.2 94.57,87.29 94.54,87.26 ; C177.1 J17.1 C178.2 40.41,87.29 40.39,87.26 ; 130.65,87.26 121.62,87.26 ; 130.65,87.26 130.67,87.29 C166.2 J10.1 C165.1 ; 121.62,87.26 121.65,87.29 C176.2 J15.1 C175.1 ; v1(4.52,84.55) 2.76,84.55 2.26,84.05 2.26,80.84 3.2,79.89 8.51,79.89 11.83,76.57 14.96,76.57 19.33,72.2 19.33,40.98 17.75,39.41 14.27,39.41 10.64,43.04 4.06,43.04 2.18,41.16 v2(2.18,28.9) 10.29,28.9 10.42,28.77 v2(11.16,28.77) ; v1(4.52,84.55) 4.52,83.89 5.27,83.14 40.64,83.14 42.82,80.96 42.82,71.66 44.45,70.04 60.6,70.04 61.11,69.53 v1(61.11,65.47) ; 150.57,55.59 150.57,47 151.08,46.49 C170.2 J12.1 C169.1 156.5,39.52 155.75,38.77 155.15,38.77 155.14,38.78 J42.1 ; 150.57,55.59 150.57,64.5 ; 150.57,55.59 150.64,55.51 C180.2 J18.1 C179.1 ; 22.33,87.26 22.36,87.29 C198.2 J27.1 C197.1 ; 22.33,87.26 31.36,87.26 ; C113.1 J4.1 C114.2 135.66,7.45 135.66,7.45 ; 72.47,7.44 C162.2 J8.1 C161.1 ; 72.47,7.44 72.46,7.45 ; 72.47,7.44 72.47,19.25 77.49,24.27 v1(77.49,27.24) ; 40.39,87.26 31.36,87.26 ; 40.39,87.26 49.41,87.26 ; 31.36,87.26 31.39,87.29 C188.2 J22.1 C187.1 ; 76.49,87.26 85.52,87.26 ; 76.49,87.26 76.52,87.29 C226.2 J41.1 C225.1 ; C219.1 J38.1 C220.2 54.42,7.44 54.41,7.45 ; 85.52,87.26 85.54,87.29 C208.2 J36.1 C207.1 ; 85.52,87.26 94.54,87.26 ; 99.54,7.45 99.55,7.44 C192.2 J24.1 C191.1 ; C224.2 J40.1 C223.1 ; C224.2 149.99,89.93 154.46,85.45 154.46,71.89 154.05,71.48 150.92,71.48 150.57,71.12 150.57,64.8 150.57,64.8 150.57,64.5 ; C164.2 J9.1 C163.1 ; C171.1 J13.1 C172.2 81.5,7.44 81.49,7.45 ; 150.57,64.5 150.61,64.54 C190.2 J23.1 C189.1 ; 49.41,87.26 49.44,87.29 C168.2 J11.1 C167.1 ; 49.41,87.26 58.44,87.26 ; 58.44,87.26 58.47,87.29 C118.2 J6.1 C117.1 ; C213.1 J34.1 C214.2 117.6,7.44 117.59,7.45 ; C211.1 J33.1 C212.2 45.4,7.44 45.38,7.45 ; C111.1 J3.1 C112.2 63.45,7.44 63.44,7.45
  BOTTOM w0.635: v2(11.16,28.77) 11.86,28.06 11.86,14.03 13.43,12.46 32.74,12.46 33.78,11.41 33.78,7.88 34.21,7.45 144.05,7.45 144.68,6.82 C164.2
+24V: length 92.5
  BOTTOM w0.508: J72.1 20.23,5.28 19.49,6.02 D104.2 ; J72.1 21.77,2.43 25.69,2.43 J69.1 27.23,5.28 27.34,5.39 D102.2 ; J72.1 18.69,2.43 14.77,2.43 J73.1 11.93,5.27 D106.2
  BOTTOM w0.635: D106.2 2.46,10.02 1.04,11.44 1.04,43.06 2.91,44.93 J25.5
VDD: length 246.8
  TOP w0.279: U16.100 106.47,54.04 v1(106.83,53.68) 106.54,53.39 U16.99
  TOP w0.305: v1(85.26,56.89) U16.30
  TOP w0.508: v1(67.1,24.47) 67.34,24.71 C234.1 L9.2 ; C93.1 43.42,29.81 U4.8 v1(41.47,29.95) ; C233.1 43.42,20.47 U6.8 ; C233.1 43.42,17.97 43.74,17.65 v1(43.74,15.63) ; C233.1 45.61,18.96 45.87,18.7 R263.2 ; J2.2 154.51,29.48 154.23,29.19 154.23,26.45 153.93,26.16 D49.1 152.7,24.75 v1(152.37,24.42) ; R256.2 46.12,28.74 v1(46.12,29.22) ; R126.2 v1(147.23,29.44) ; R265.1 v1(150.51,34.56)
  BOTTOM w0.508: v1(46.12,29.22) 45.4,29.95 v1(41.47,29.95) 34.21,29.95 33.7,29.44 33.7,15.63 34.24,15.1 43.2,15.1 ; C230.2 82.68,55.48 81.96,54.77 81.96,37.58 76.88,32.5 71.14,32.5 69.59,30.94 69.59,25.45 68.61,24.47 v1(67.1,24.47) 57.73,15.1 44.32,15.1 ; C230.2 85.61,56.54 v1(85.26,56.89) ; C230.2 88.57,55.48 88.57,55.18 90.75,52.99 93.29,52.99 96.54,56.25 104.75,56.25 105.32,55.67 C231.1 ; v1(152.37,24.42) 146.18,24.42 145.67,24.93 145.67,28.92 146.19,29.44 v1(147.23,29.44) 149.92,29.44 150.51,30.02 v1(150.51,34.56) 150.51,40.41 137.23,53.68 v1(106.83,53.68)
  BOTTOM w0.635: C231.1 106.09,54.42 v1(106.83,53.68) 105.87,52.72 C232.1
0: length 306.4
  TOP w0.254: U16.98 103.3,52.74
  TOP w0.279: 103.07,52.74 103.07,52.74 103.3,52.74 103.28,52.72 v1(102.24,52.72) 102.87,52.09 U16.97
  TOP w0.305: U16.20 91.76,56.82 v1(91.77,56.83)
  TOP w0.508: R51.2 130.89,85.4 ; 130.89,85.4 v2(132.04,85.4) ; 130.89,85.4 Q113.2 ; 45.18,10.16 45.18,10.16 ; 45.18,10.16 v2(44.02,10.16) ; 45.18,10.16 R200.2 ; R140.2 147.89,64.32 147.89,64.33 v2(147.89,63.17) ; Q111.2 v2(134.31,10.18) ; L11.1 v1(14.04,74.86) ; R81.2 121.86,85.4 ; 121.86,85.4 v2(123.02,85.4) ; 121.86,85.4 Q120.2 ; v1(147.57,32.23) C92.1 147.6,33.36 C94.1 ; D7.3 v1(14.98,22.51) ; C130.2 v2(125.39,84.58) ; R202.2 117.39,11.22 117.39,11.21 Q135.2 v2(116.23,10.16) ; C158.2 v2(131.84,11.08) ; C141.2 v2(26.15,84.58) ; Q127.2 99.33,10.16 R142.2 ; 140.19,86.38 140.19,85.67 139.91,85.4 R21.2 ; v2(113.96,85.43) Q121.2 112.83,85.4 R114.2 ; C152.2 v2(50.63,11.08) ; v2(80.13,10.16) Q119.2 81.28,10.16 R77.2 ; C157.2 v2(59.68,11.03) ; R12.2 67.71,85.4 ; 67.71,85.4 67.68,85.43 ; 67.71,85.4 v2(68.86,85.4) ; C135.2 v2(116.44,84.56) ; D5.3 v1(14.98,31.84) ; v2(104.94,85.43) Q128.2 103.81,85.4 R146.2 ; R230.2 54.2,10.27 54.09,10.16 v2(52.93,10.16) ; R47.2 72.26,11.22 72.26,11.21 Q115.2 v2(71.1,10.16) ; C138.2 v2(95.79,11.03) ; C153.2 v2(122.86,11.1) ; Q112.2 v2(141.04,85.43) ; C121.2 v2(60.6,84.58) ; 148.84,55 147.75,55 147.45,55.3 145.84,55.3 R107.2 ; R49.2 144.46,11.22 144.47,11.21 144.47,10.16 ; 49.65,85.4 Q117.2 ; 49.65,85.4 R73.2 ; 49.65,85.4 v2(50.81,85.4) ; C159.2 v2(143.52,84.56) ; C129.2 v2(150.13,11.03) ; v2(95.91,85.43) Q129.2 94.78,85.4 R176.2 ; 85.76,85.4 Q136.2 ; 85.76,85.4 v2(86.91,85.4) ; 85.76,85.4 R206.2 ; C124.2 v2(140.94,11.03) ; 22.57,85.4 Q132.2 ; 22.57,85.4 R168.2 ; 22.57,85.4 v2(23.73,85.4) ; C142.2 v2(147.07,69.75) ; Q131.2 v2(35.03,10.18) ; 76.73,85.4 v2(77.89,85.4) ; 76.73,85.4 R236.2 ; 76.73,85.4 Q137.2 ; C136.2 v2(35.18,84.58) ; C143.2 v2(104.84,11.03) ; C123.2 v2(68.66,10.98) ; C132.2 v2(147.05,51.62) ; 135.44,10.16 135.44,11.21 135.44,11.22 R19.2 ; v2(125.26,10.16) Q139.2 126.42,11.21 126.41,11.22 R232.2 ; v2(14.68,85.43) Q133.2 13.55,85.4 R198.2 ; R105.2 40.63,85.4 ; 40.63,85.4 v2(41.78,85.4) ; 40.63,85.4 Q124.2 ; C155.2 v2(80.31,84.61) ; v2(89.16,10.16) Q122.2 90.31,10.16 R109.2 ; C51.1 v1(147.23,27.66) ; v1(146.09,37.81) R254.1 144.94,37.82 Q141.2 ; Q125.2 v2(32.73,85.43) ; R234.2 v2(150.09,83.35) ; C131.2 v2(44.18,84.58) ; C128.2 v2(77.67,11) ; C151.2 v2(7.95,84.58) ; Q116.2 v2(59.81,85.43) ; Q114.2 v2(143.34,10.18) ; R172.2 108.36,11.22 108.36,11.21 Q130.2 v2(107.21,10.16) ; C148.2 v2(113.89,11.03) ; R16.2 63.23,11.22 63.23,11.21 Q110.2 v2(62.08,10.16) ; C140.2 v2(107.41,84.56) ; C137.2 v2(147.07,60.65) ; C147.2 v2(41.62,10.98) ; C133.2 v2(86.66,11.03) ; C93.2 v1(40.36,28.3) ; C126.2 v2(53.18,84.58) ; C125.2 v2(134.51,84.58) ; C146.2 v2(17.13,84.58) ; C160.2 v2(71.26,84.58) ; C145.2 v2(98.31,84.53) ; C150.2 v2(89.33,84.58) ; Q138.2 v2(150.07,85.43) ; Q123.2 v2(147.89,54.15) ; R255.2 v1(54.48,31.83)
  BOTTOM w0.305: C230.1 v1(87.03,53.55)
  BOTTOM w0.508: C232.2 v1(102.24,52.72) ; v2(150.44,5.66) 149.47,5.66 149.47,5.66 C164.1 ; v2(86.97,5.63) 86.31,5.63 86.29,5.66 C172.1 ; C227.2 v1(102.13,50.79) ; C113.2 v2(139.81,1.54) ; v2(25.91,89.95) 26.57,89.95 26.6,89.93 C188.1 ; v2(141.13,5.63) 140.47,5.63 140.44,5.66 C114.1 ; C196.1 v2(98.23,89.93) ; C224.1 v2(143.36,89.93) ; v2(7.86,89.95) 8.52,89.95 8.55,89.93 C216.1 ; C111.2 v2(67.61,1.54) ; C226.1 71.73,89.93 71.7,89.95 v2(71.04,89.95) ; C192.1 104.34,5.66 104.37,5.63 v2(105.03,5.63) ; C177.2 35.98,94.04 v2(35.97,94.04) ; C183.2 v2(108.46,94.04) ; C215.2 v2(9.18,94.04) ; C168.1 44.65,89.93 44.62,89.95 v2(43.96,89.95) ; C221.2 v2(130.79,1.54) ; C116.1 v2(134.33,89.93) ; C205.2 v2(90.41,94.04) ; C200.1 41.16,5.66 41.18,5.63 v2(41.84,5.63) ; C169.2 v2(156.5,50.65) ; C206.1 v2(89.2,89.93) ; C161.2 v2(76.63,1.54) ; C162.1 77.26,5.66 77.29,5.63 v2(77.95,5.63) ; C179.2 v2(156.5,59.67) ; C184.1 v2(107.25,89.93) ; C166.1 v2(125.31,89.93) ; C171.2 v2(85.66,1.54) ; C167.2 v2(45.28,94.04) ; C212.1 50.18,5.66 50.21,5.63 v2(50.87,5.63) ; C195.2 v2(99.44,94.04) ; v2(62.02,89.95) 62.68,89.95 62.7,89.93 C108.1 ; C223.2 v2(144.57,94.04) ; C214.1 122.39,5.66 122.42,5.63 v2(123.08,5.63) ; C207.2 v2(81.38,94.04) ; v2(59.9,5.63) 59.24,5.63 59.21,5.66 C220.1 ; C208.1 v2(80.18,89.93) ; C178.1 35.62,89.93 35.6,89.95 v2(34.94,89.95) ; C117.2 v2(54.31,94.04) ; C219.2 v2(58.58,1.54) ; C187.2 v2(27.23,94.04) ; C199.2 v2(40.53,1.54) ; C107.2 v2(63.33,94.04) ; C213.2 v2(121.76,1.54) ; v2(114.05,5.63) 113.39,5.63 113.37,5.66 C202.1 ; C189.2 v2(156.5,68.7) ; v2(152.41,60.99) 152.41,60.33 152.39,60.3 C180.1 ; C198.1 17.57,89.93 17.55,89.95 v2(16.89,89.95) ; C163.2 v2(148.84,1.54) ; C165.2 v2(126.51,94.04) ; v2(68.92,5.63) 68.26,5.63 68.24,5.66 C112.1 ; C118.1 53.68,89.93 53.65,89.95 v2(52.99,89.95) ; C225.2 v2(72.36,94.04) ; C211.2 v2(49.55,1.54) ; C170.1 152.39,51.28 152.41,51.3 v2(152.41,51.96) ; C181.2 v2(94.68,1.54) ; v2(132.1,5.63) 131.44,5.63 131.42,5.66 C222.1 ; v2(96,5.63) 95.34,5.63 95.31,5.66 C182.1 ; C176.1 v2(116.28,89.93) ; C175.2 v2(117.49,94.04) ; C191.2 v2(103.71,1.54) ; C115.2 v2(135.54,94.04) ; C201.2 v2(112.74,1.54) ; C197.2 v2(18.2,94.04)
  BOTTOM w0.635: L10.1 v1(14.55,35.21) ; C231.2 C232.2
  vias: v1(6.93,64.14) v1(8.41,6.61) v1(10.01,66.89) v1(13.76,6.79) v1(21.28,7.02) v1(23.95,69.96) v1(24.74,76.11) v1(25.73,6.61) v1(27.86,76.62) v1(29.06,6.26) v1(32.38,77.71) v1(34.8,78.95) v1(39.39,79.26) v1(41.68,79.03) v1(44.5,79.36) v1(47.32,78.93) v1(50.26,71.31) v1(50.26,68.77) v1(50.26,66.23) v1(50.26,63.69) v1(50.26,61.15) v1(50.26,58.61) v1(52.7,79.38) v1(52.8,71.31) v1(52.8,68.77) v1(52.8,66.23) v1(52.8,63.69) v1(52.8,61.15) v1(52.8,58.61) v1(55.34,71.31) v1(55.34,68.77) v1(55.34,66.23) v1(55.34,63.69) v1(55.34,61.15) v1(55.34,58.61) v1(57.2,79.23) v1(57.88,71.31) v1(57.88,68.77) v1(57.88,66.23) v1(57.88,63.69) v1(57.88,61.15) v1(57.88,58.61) v1(59.99,79.61) v1(61.62,79.54) v1(62.76,31.56) v1(64.08,68.23) v1(65.91,80.07) v1(76.58,73.44) v1(78.31,41.26) v1(79.78,58.15) v1(80.29,74.89) v1(81.94,76.54) v1(83.16,57.21) v1(85.24,23.96) v1(86.1,77.94) v1(87.5,46.26) v1(87.78,23.96) v1(88.95,50.61) v1(90.04,78.47) v1(91.97,50.63) v1(93.04,80.1) v1(95.04,50.73) v1(96.01,23.66) v1(96.29,77.33) v1(98.4,59.7) v1(101.78,78.34) v1(102.77,74.46) v1(103.76,22.72) v1(106.47,39.96) v1(106.96,65.41) v1(109.68,58.4) v1(110.74,79.64) v1(111.17,73.11) v1(112.7,70.98) v1(118.13,49.92) v1(119.15,74.03) v1(120.24,80.07) v1(121.77,23) v1(121.92,28.31) v1(122.1,32.37) v1(124.38,38.74) v1(125.17,79.79) v1(125.63,36.79) v1(127.91,50.81) v1(129.28,79.49) v1(130.6,42.3) v1(132.56,47.48) v1(133.73,78.9) v1(136.52,66.15) v1(136.47,57.29) v1(136.7,61.63) v1(138.02,79.11) v1(141.78,79.79) v1(144.22,77.63) v2(147.05,53.27)
BUZZER_DRV: length 48.3
  TOP w0.203: R253.1 144.93,34.78 144.3,34.15 142.06,34.15 141.15,35.06 141.15,36.94 138.38,39.71 111.45,39.71 109.78,38.03 104.82,38.03 104.11,38.75 U16.80
LT1_DRV3: length 83.8
  TOP w0.203: U16.44 80.3,45.59 79.55,44.84 v1(75.85,44.84) ; R128.1 v1(14.38,14.4)
  BOTTOM w0.203: v1(75.85,44.84) 44.83,44.84 v1(14.38,14.4)
NRST: length 71.2
  TOP w0.203: v1(117.14,38.62) 115.77,38.62 115.57,38.41 115.57,36.26 115.92,35.9 137.41,35.9 142.34,30.97 149.99,30.97 150.32,30.64 R126.1 ; R126.1 D49.2 152.7,31.51 153.21,32.02 J2.3 ; R126.1 C51.2 ; U16.90 108.49,47.54 110.74,45.29 v1(116.72,45.29)
  BOTTOM w0.203: v1(116.72,45.29) 116.36,44.93 116.36,39.4 v1(117.14,38.62)
PROCESSOR_LED: length 97
  TOP w0.203: R270.2 16.63,78.37 23.42,71.59 v1(46.76,71.59) ; U16.19 v1(92.41,53.95) ; v1(62.56,71.61) 64.16,70.01 64.77,70.01 v1(71.75,63.03)
  BOTTOM w0.203: v1(71.75,63.03) 90.57,63.03 92.41,61.19 v1(92.41,53.95) ; v1(46.76,71.59) 48.21,73.03 61.14,73.03 v1(62.56,71.61)
RS485_A: length 61.2
  TOP w0.254: J25.1 15.34,50.01 15.62,50.29 15.62,50.94 15.13,51.42 13.02,51.42 12.75,51.16 12.75,40.48 13.67,39.56 13.67,32.37 14.06,31.99 14.86,32.79 D5.2 19.31,32.79 20.01,32.1 21.45,32.1 21.7,32.35 21.7,33.08 L3.3
  BOTTOM w0.254: J25.1 13.42,50.93 13.42,58.57 12.85,59.14 12.85,70.34 13.26,70.75 15.3,70.75 15.87,70.18 15.87,69.52 15.58,68.94 15.43,68.79 J43.1
RS485_A2: length 20.6
  TOP w0.254: J44.3 3.91,22.99 4.16,22.74 13.81,22.74 14.53,23.46 D7.2 19.31,23.46 20.01,22.77 21.49,22.77 21.72,23 L5.3
RS485_B: length 71
  TOP w0.254: J25.2 16.12,49.5 16.12,51.15 15.34,51.93 12.81,51.93 12.24,51.37 12.24,40.27 13.16,39.35 13.16,32.16 13.85,31.48 14.06,31.48 14.65,30.89 D5.1 19.31,30.89 20.01,31.59 21.43,31.59 21.72,31.29 L3.4
  BOTTOM w0.254: J25.2 13.26,48.74 12.85,49.15 12.85,58.42 12.34,58.93 12.34,70.55 13.05,71.26 15.51,71.26 16.38,70.39 16.38,69.4 15.83,68.29 15.95,67.93 16.36,67.52 J43.2
RS485_B2: length 20.5
  TOP w0.254: L5.4 21.72,22.01 21.47,22.26 20.01,22.26 19.31,21.56 D7.1 14.47,21.56 13.81,22.23 4.31,22.23 3.91,21.83 J44.2
RS485_DIR: length 56.2
  TOP w0.203: U4.3 49.45,32.49 v1(50.11,31.83) ; v1(50.11,31.83) 49.5,31.22 U4.2 ; v1(50.11,31.83) R255.1 ; v1(50.18,29.61) 54.47,29.61 57.44,32.59 70.84,32.59 73.23,34.98 73.23,47.15 73.62,47.54 U16.41
  BOTTOM w0.203: v1(50.11,31.83) 50.11,30.19 50.18,30.12 v1(50.18,29.61)
RS485_DIR2: length 65.3
  TOP w0.203: U6.3 49.96,23.15 50.59,22.51 ; U6.2 49.96,21.88 50.59,22.51 ; 50.59,22.51 R262.1 51.39,23.9 51.81,24.32 54.58,24.32 59.41,29.15 93.48,29.15 99.56,35.23 U16.73
RX: length 105.1
  TOP w0.203: R256.1 48.75,28.88 48.54,29.1 48.5,29.1 48.23,29.36 U4.1 ; U4.1 46.44,29.95 46.43,29.96 45.82,29.96 45.34,29.48 45.34,26.63 45.01,26.3 6.03,26.3 5.35,26.98 D1.4 ; U4.1 48.87,29.95 49.39,30.47 54.46,30.47 57.16,33.17 70.41,33.17 72.44,35.21 72.44,47.61 73.02,48.19 U16.40
RX2: length 71.1
  TOP w0.203: R263.1 48.75,19.63 48.23,20.15 U6.1 46.33,20.61 45.41,21.53 45.41,25.8 46.25,26.63 54.58,26.63 58.27,30.32 92.99,30.32 98.26,35.59 U16.71
SEN_DRV1: length 34.7
  TOP w0.203: R11.1 67.71,78.24 88.51,57.44 U16.25
SEN_DRV2: length 41.8
  TOP w0.203: U16.27 87.21,57.09 65.85,78.45 61.49,78.45 61.49,78.45 59.12,78.45 58.68,78.89 R42.1
SEN_DRV3: length 51.2
  TOP w0.203: U16.31 82.66,54.04 81.53,55.17 81.53,61.11 65.36,77.28 61.98,77.28 61.98,77.28 50.64,77.28 49.66,78.27 R72.1
SEN_DRV4: length 62.2
  TOP w0.203: U16.33 81.25,52.74 78.65,55.34 78.65,62.35 64.88,76.11 62.46,76.11 62.46,76.11 41.5,76.11 40.63,76.98 R104.1
SEN_DRV5: length 70.4
  TOP w0.203: R137.1 31.6,80.29 36.95,74.95 64.4,74.95 77.02,62.32 77.02,54.21 79.79,51.44 U16.35
SEN_DRV6: length 81
  TOP w0.203: U16.37 77.88,50.14 75.47,52.55 75.47,62.22 63.91,73.78 28.92,73.78 22.58,80.12 R167.1
SEN_DRV7: length 99.5
  TOP w0.203: U16.42 77.07,46.89 v1(76.38,46.2) ; R197.1 v1(13.55,80.2)
  BOTTOM w0.203: v1(13.55,80.2) 13.55,79.69 20.75,72.49 20.75,50.42 24.39,46.77 72.39,46.77 72.96,46.2 v1(76.38,46.2)
SEN_DRV11: length 42.4
  TOP w0.203: U16.83 106.54,42.99 108.51,41.03 123.36,41.03 126.96,44.64 143.58,44.64 144.03,45.09 R74.1
SEN_DRV12: length 50
  TOP w0.203: R106.1 127.46,55.27 125.12,52.94 125.12,44.45 122.87,42.2 109.18,42.2 107.08,44.29 U16.85
SEN_DRV13: length 58.7
  TOP w0.203: U16.87 107.62,45.59 109.85,43.37 122.39,43.37 123.95,44.93 123.95,62.65 125.63,64.32 R139.1
SEN_DRV14: length 70.3
  TOP w0.203: U16.51 85.26,39.09 85.03,38.87 76.66,38.87 76.55,38.98 v1(75.92,38.98) ; R169.1 36.15,15.36 37.56,16.77 v1(37.56,17.37)
  BOTTOM w0.203: v1(75.92,38.98) 62.6,38.98 56.82,33.2 56.82,24.04 56.07,23.29 38.27,23.29 37.56,22.58 v1(37.56,17.37)
SEN_DRV15: length 62.5
  TOP w0.203: U16.53 86.56,37.85 85.79,37.08 75.89,37.08 v1(75.89,37.19) ; R199.1 45.18,15.45 46.58,16.86 v1(46.58,17.37)
  BOTTOM w0.203: v1(46.58,17.37) 46.58,20.74 47.77,21.93 56.76,21.93 57.99,23.15 57.99,32.71 62.46,37.19 v1(75.89,37.19)
SEN_DRV16: length 54.3
  TOP w0.203: U16.55 87.86,36.99 85.96,35.09 76.51,35.09 76.39,35.2 v1(75.89,35.2) ; v1(55.61,17.37) 55.61,16.86 54.2,15.45 R229.1
  BOTTOM w0.203: v1(55.61,17.37) 55.61,18.49 59.15,22.03 59.15,32.23 62.13,35.2 v1(75.89,35.2)
SEN_DRV17: length 42.3
  TOP w0.203: U16.57 89.16,36.04 86.55,33.43 82.48,33.43 82.37,33.54 v1(81.86,33.54) ; v1(64.64,17.37) 64.64,16.77 63.23,15.36 R15.1
  BOTTOM w0.203: v1(64.64,17.37) 64.64,17.41 65.48,18.25 69.17,18.25 75.41,24.49 75.41,27.6 81.35,33.54 v1(81.86,33.54)
SEN_DRV18: length 33.8
  TOP w0.203: v1(88.56,33.55) 90.46,35.45 U16.59 ; v1(73.66,17.37) 73.66,16.73 72.26,15.32 R46.1
  BOTTOM w0.203: v1(88.56,33.55) 73.66,18.65 73.66,18.64 v1(73.66,17.37)
SEN_DRV19: length 30.6
  TOP w0.203: v1(91.11,33.6) 91.76,34.25 U16.61 ; R76.1 81.28,15.28 82.69,16.69 v1(82.69,17.37)
  BOTTOM w0.203: v1(91.11,33.6) 82.69,25.18 82.69,17.87 v1(82.69,17.37)
SEN_DRV20: length 27.4
  TOP w0.203: v1(91.71,17.37) 91.71,16.57 90.31,15.16 R108.1 ; U16.63 93.06,33.56 92.95,33.44 v1(92.95,32.94)
  BOTTOM w0.203: v1(92.95,32.94) 92.95,31.34 91.71,30.11 91.71,17.87 v1(91.71,17.37)
SEN_DRV21: length 29.6
  TOP w0.203: v1(94.38,33.94) 94.38,34.45 94.29,34.54 94.29,39.13 94.36,39.19 U16.65 ; v1(100.74,17.37) 100.74,16.63 99.33,15.22 R141.1
  BOTTOM w0.203: v1(94.38,33.94) 94.38,33.44 100.89,26.92 100.89,18.02 100.74,17.87 v1(100.74,17.37)
SEN_DRV22: length 32.9
  TOP w0.203: v1(96.25,35.48) 95.5,36.23 95.5,38.31 95.66,38.47 U16.67 ; v1(109.77,17.37) 109.77,16.61 108.36,15.21 R171.1
  BOTTOM w0.203: v1(109.77,17.37) 109.77,17.87 109.85,17.96 109.85,21.37 96.25,34.97 v1(96.25,35.48)
SEN_DRV23: length 37.5
  TOP w0.203: v1(118.47,17.01) 118.47,16.19 117.39,15.1 R201.1 ; U16.69 96.96,38.02 96.85,37.91 v1(96.85,37.77)
  BOTTOM w0.203: v1(118.47,17.01) 118.47,18.7 117.65,19.53 114.58,19.53 96.85,37.26 v1(96.85,37.77)
SEN_DRV24: length 49.5
  TOP w0.203: U16.74 100.21,32.59 106.93,25.86 125.87,25.86 127.99,23.74 127.99,16.62 126.41,15.05 R231.1
SEN_DRV25: length 57.4
  TOP w0.203: U16.76 101.51,35.75 107.03,30.23 133.88,30.23 137.06,27.05 137.06,16.71 135.44,15.08 R18.1
SEN_DRV26: length 62
  TOP w0.203: U16.78 102.81,38.01 107.08,33.74 136.26,33.74 146.16,23.85 146.16,16.73 144.46,15.04 R48.1
SEN_DRV32: length 57.4
  TOP w0.203: U16.1 104.11,56.97 122,74.86 143.79,74.86 148.94,80.02 R233.1
SEN_DRV33: length 52.5
  TOP w0.203: R20.1 139.92,77.06 139.15,76.3 120.3,76.3 102.81,58.8 U16.3
SEN_DRV34: length 45.2
  TOP w0.203: R50.1 130.89,78.86 129.81,77.77 117.96,77.77 101.51,61.32 U16.5
SEN_DRV35: length 38
  TOP w0.203: R80.1 121.86,79.91 121.13,79.18 116.09,79.18 100.21,63.3 U16.7
SEN_DRV36: length 32.9
  TOP w0.203: U16.13 96.31,63.02 112.84,79.55 R113.1
SEN_DRV37: length 29.7
  TOP w0.203: U16.15 95.01,69.3 103.81,78.11 R145.1
SEN_DRV38: length 26.5
  TOP w0.203: U16.17 93.71,56.37 93.78,56.44 93.78,79.28 94.79,80.29 R175.1
SEN_DRV39: length 28.3
  TOP w0.203: U16.21 91.11,74.68 85.76,80.03 R205.1
SEN_DRV40: length 31.5
  TOP w0.203: R235.1 76.73,79.87 89.81,66.79 U16.23
SEN_IN1: length 40.4
  TOP w0.203: U16.26 87.86,57.27 66.09,79.03 64.14,79.03 63.94,79.24 R23.1 C121.1
SEN_IN2: length 46.7
  TOP w0.203: U16.28 86.56,56.91 65.61,77.87 61.74,77.87 61.73,77.87 55.59,77.87 54.91,78.55 R53.1 C126.1
